# Altium PCB FFC-STDC14-adapter.PcbDoc
Units mm, origin at the board's own origin, x right, y up, seen from the top; angles counter-clockwise.
Board outline 9 x 10 mm, 2 copper layers (Top Layer, Bottom Layer), stack 1.571 mm thick; 2 components, 7 nets, 24 pads, 10 vias.
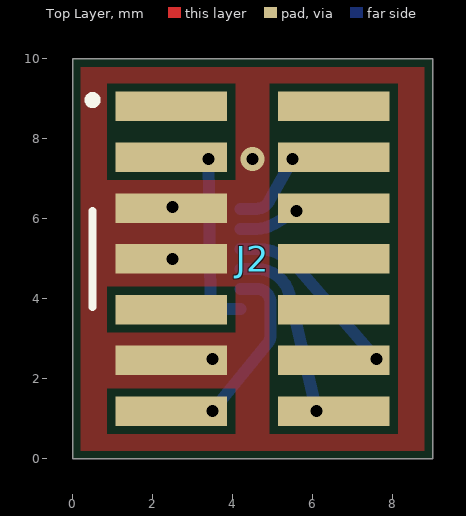
[diagram p0: Top Layer view]
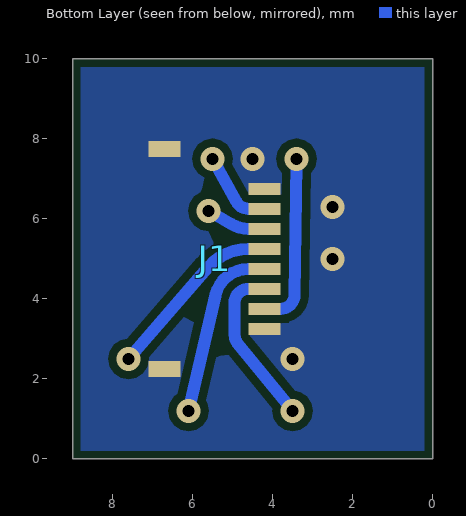
[diagram p1: Bottom Layer view, seen from below]

## Layer stack, top to bottom
Top Solder: solder mask 0.0102, Solder Resist, Dk 3.5
Top Layer: signal copper 0.0356
Dielectric 1: dielectric 1.5, FR-4, Dk 4.8
Bottom Layer: signal copper 0.0356
Bottom Solder: solder mask 0.0102, Solder Resist, Dk 3.5

## Board outline
0,0 9,0 9,10 0,10

## Design rules (kind name [scope] priority, off if disabled: settings)
BoardOutlineClearance [All] p1: gap=0.2 ignorepadtopadclearanceinfootprint=FALSE except(0: Arc-SplitContinuation Track-SplitContinuation SMDPad-SplitContinuation THPad-SplitContinuation Via-SplitContinuation Fill-SplitContinuation Poly-SplitContinuation Region-SplitContinuation Text-SplitContinuation)
Clearance [All] p1: gap=0.2 ignorepadtopadclearanceinfootprint=FALSE except(0: Arc-Hole Track-Hole SMDPad-Hole THPad-Hole Via-Hole Fill-Hole Poly-Hole Region-Hole Text-Hole)
ComponentClearance [All] p1: gap=0.2 collisioncheckmode=3 verticalgap=0.2 showdistances=FALSE
HoleSize [All] p1: absolutevalues=TRUE maxlimit=3 minlimit=0.2 maxpercent=80.000 minpercent=20.000
HoleToHoleClearance [All] p1: gap=0.5 allowstackedmicrovias=TRUE
MinimumSolderMaskSliver [All] p1: minsoldermaskwidth=0.2
PolygonConnect [All] p1: connectstyle=Direct reliefconductorwidth=0.254 reliefentries=4 polygonreliefangle="90 Angle" airgapwidth=0.254
RoomDefinition FFC-STDC14-adapter [InComponentClass('FFC-STDC14-adapter')] p1: confinementstyle=ConfineIn formatcopy=TRUE lockcomponents=FALSE outline -50,-50 90,-50 90,84 -50,84
RoutingVias [All] p1: holewidth=0.6 width=0.6 viastyle="Through Hole" minholewidth=0.3 minwidth=0.6 maxholewidth=5 maxwidth=3
SilkToSilkClearance [All] p1: silktosilkclearance=0.2
SilkToSolderMaskClearance [IsPad] p1: minsilkscreentomaskgap=0.2 clearancetoexposedcopper=TRUE
SolderMaskExpansion [All] p1: expansion=0.05 istentingtop=FALSE
Width [All] p1: maxlimit=5 minlimit=0.2 preferedwidth=0.3
24 further rules are at their usual default settings.

## Components (designator, comment, footprint, x,y, rotation, side; value= is the part's Value field where it differs from the comment)
J1 "FPC" HIROSE-FH19C-8S-0.5SH 6.7,5 r270 bottom
J2 "FTSH-107-01-L-DV-K" FTSH-107-01-L-DV-K 4.5,5 r270 top

## Footprints (in the part's own frame and the unit in brackets; to place one, negate y for a bottom-side part, rotate by r counter-clockwise, add the part's x,y. Pads: shape width x height; smd on the part's side, far side on the other; paste and mask are expansions set on the pad)
FTSH-107-01-L-DV-K [mil]
  rect 29x110 smd mask+2: 1(-150,-80) 2(-150,80) 3(-100,-80) 4(-100,80) 5(-50,-80) 6(-50,80) 7(0,-80) 8(0,80) 9(50,-80) 10(50,80) 11(100,-80) 12(100,80) 13(150,-80) 14(150,80)
  silkscreen extent -160,-161 47,-154, body extent -175,-115 175,115, height 242
HIROSE-FH19C-8S-0.5SH [mm]
  rect 0.3x0.8 smd paste+0 mask+0.102: 1(-1.75,2.5) 2(-1.25,2.5) 3(-0.75,2.5) 4(-0.25,2.5) 5(0.25,2.5) 6(0.75,2.5) 7(1.25,2.5) 8(1.75,2.5)
  rect 0.4x0.8 smd paste+0 mask+0.102: SH(-2.75,0) SH(2.75,0)
  body extent -3,-0.8 3,2.7, height 0.9

## Part data
J1: library part FPC-CONNECTOR-8

## Via types
v1: diameter 0.6, hole 0.3, Top Layer to Bottom Layer, tented top, 10 vias

## Nets (pads, with @x,y where several pads share a name; then routed paths per layer and width w, separated by ;. In a path a pad name is that pad's centre, name@x,y a point inside that pad or via, vN(x,y) a via of type N, cw(c..) or ccw(c..) an arc to the next point about the centre after c; other vN are vias at no path point)
GND: J1.1 J1.8 J1.SH J2.5 J2.7 J2.11
  other v1: 3.5,2.5 2.5,5 2.5,6.3 4.5,7.5
T_NRST: J1.4 J2.12 | length 4.6
  Bottom Layer w0.3: J1.4 4.602,5.25 cw(c4.6,3.9) 5.622,4.782 v1(7.6,2.5)
T_SWCLK: J1.3 J2.6 | length 1.5
  Bottom Layer w0.3: J1.3 4.6,5.75 ccw(c4.6,6.6) 5.029,5.866 v1(5.6,6.2)
T_SWDIO: J1.2 J2.4 | length 2
  Bottom Layer w0.3: J1.2 4.6,6.25 ccw(c4.6,6.6) 4.906,6.43 v1(5.5,7.5)
T_VCC: J1.7 J2.3 | length 4.3
  Bottom Layer w0.3: v1@3.4,7.4 3.45,4.095 ccw(c3.8,4.1) 3.8,3.75 J1.7
  other v1: 3.4,7.5
T_VCP_RX: J1.6 J2.13 | length 4.2
  Bottom Layer w0.3: v1(3.5,1.2) 4.871,2.878 ccw(c4.6,3.1) 4.95,3.1 4.95,3.9 ccw(c4.6,3.9) 4.6,4.25 J1.6
T_VCP_TX: J1.5 J2.14 | length 4.5
  Bottom Layer w0.3: J1.5 4.6,4.75 cw(c4.6,3.9) 5.428,4.091 v1(6.1,1.2)
pads on no net: J2.1 J2.2 J2.8 J2.9 J2.10

## Polygon pours and split planes (outlines as drawn)
GND on Top Layer "NONET_L-01_P-001" (solid, remove dead copper, pour order 1): 0,10 9,10 9,0 0,0
GND on Bottom Layer "NONET_L-01_P-001" (solid, remove dead copper, pour order 0): 0,10 9,10 9,0 0,0

## Silkscreen, mask and mechanical layers (free items; w line width, h text height)
Mechanical 1:
  the board outline again, w0.2